# EAGLE board Qwiic_High_Performance_Magnetometer_X01-Panel (EAGLE 9.6.2), part 1 of 4
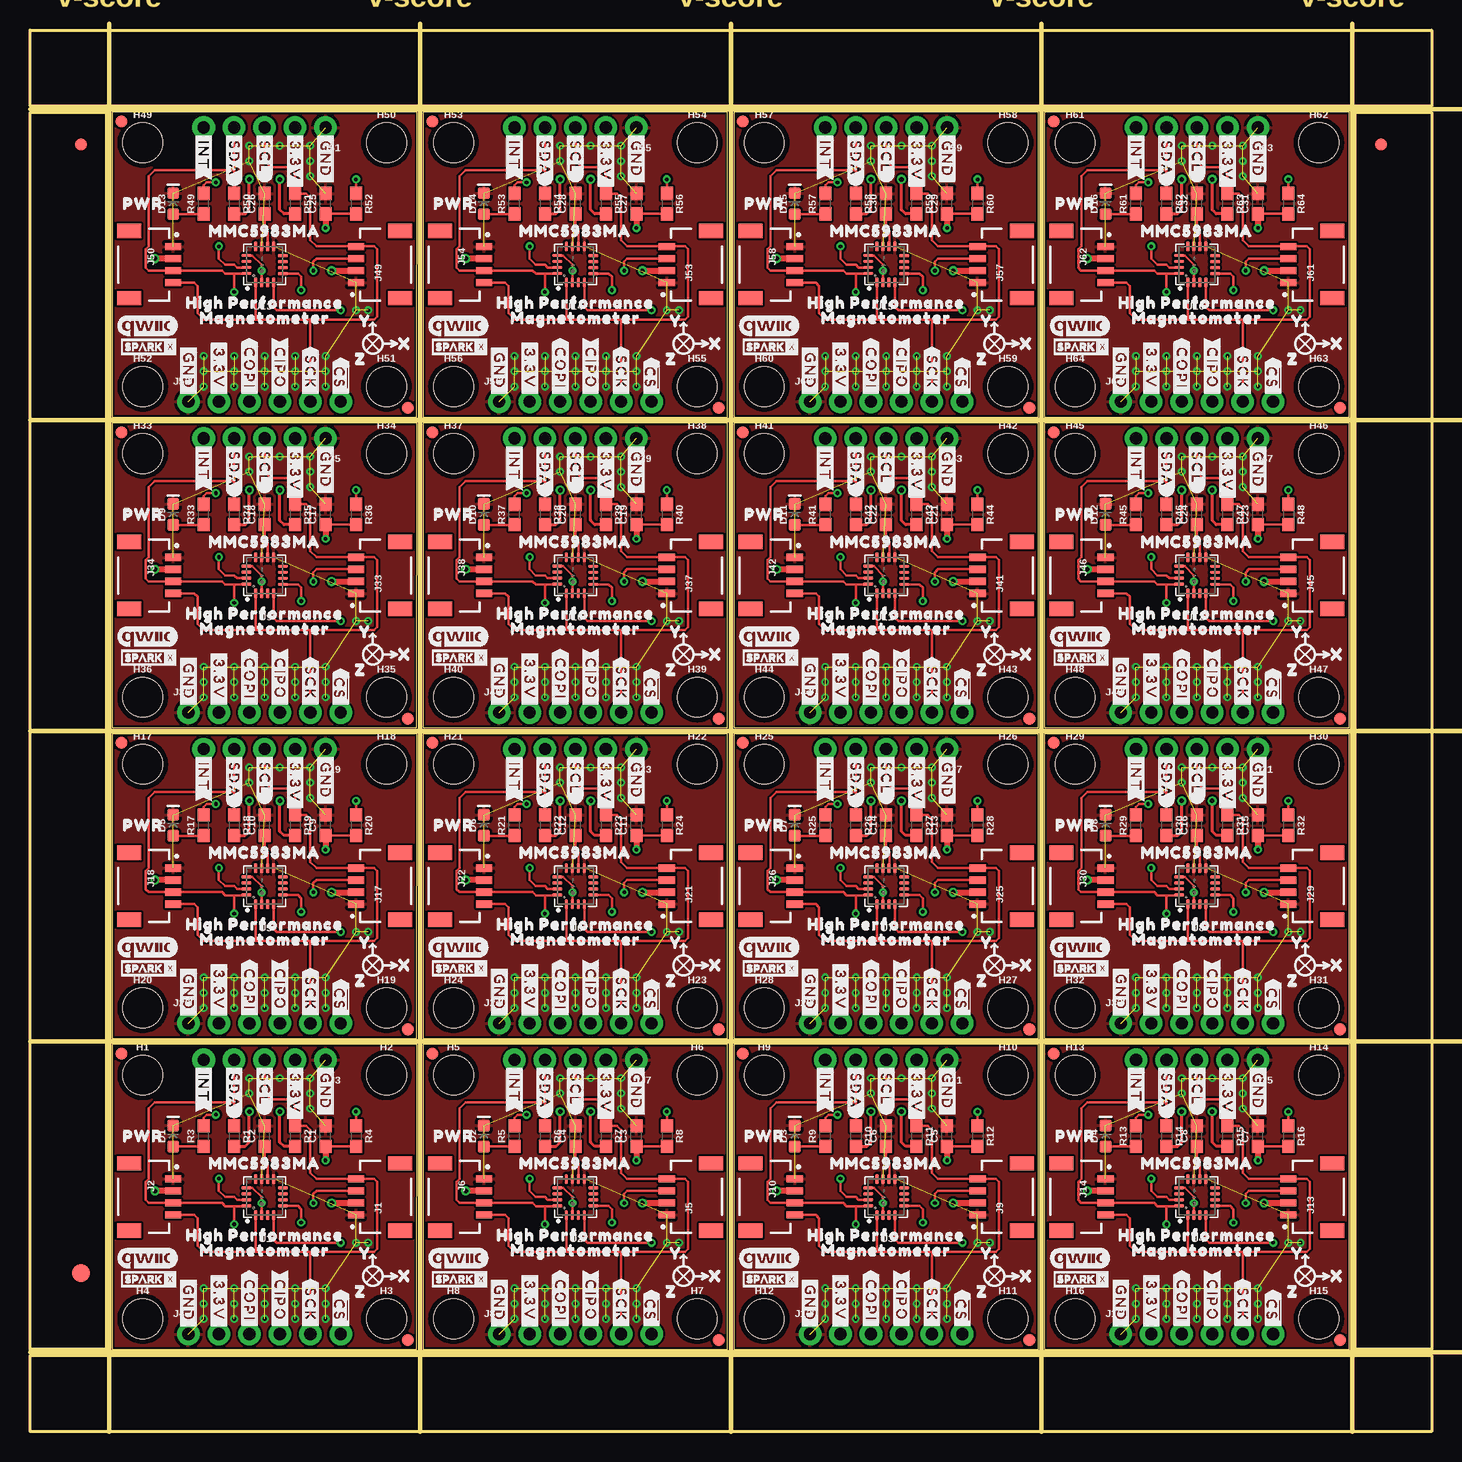
[diagram p0: board, top side]
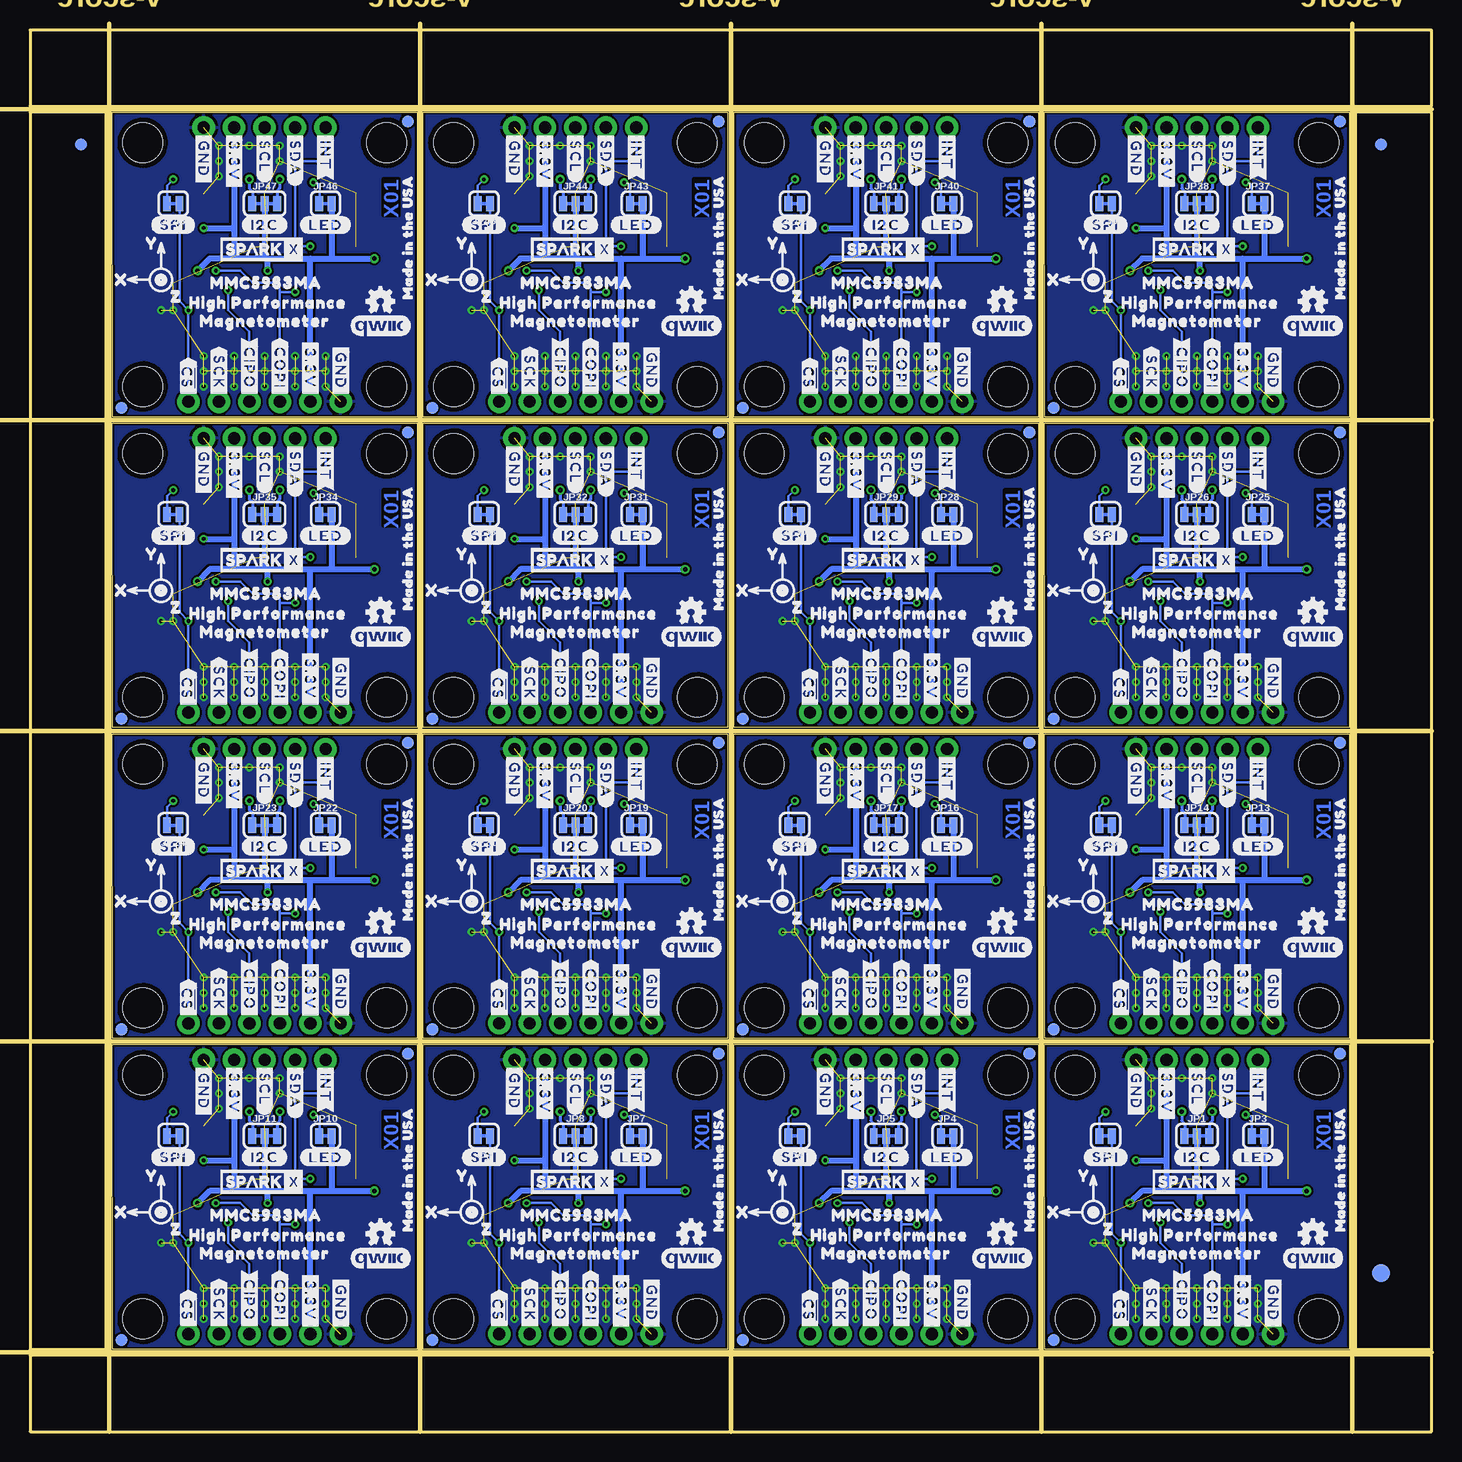
[diagram p1: board, bottom side, seen from below]

Size 116.84 x 116.84 mm. Coordinates in mm from the lower left corner, seen from the top.
Outline: 6.86,6.86 32.24,6.86 32.26,32.26 6.86,32.26 6.86,6.86
Outline: 32.77,6.86 58.15,6.86 58.17,32.26 32.77,32.26 32.77,6.86
Outline: 58.67,6.86 84.05,6.86 84.07,32.26 58.67,32.26 58.67,6.86
Outline: 84.58,6.86 109.96,6.86 109.98,32.26 84.58,32.26 84.58,6.86
Outline: 6.86,32.77 32.24,32.77 32.26,58.17 6.86,58.17 6.86,32.77
Outline: 32.77,32.77 58.15,32.77 58.17,58.17 32.77,58.17 32.77,32.77
Outline: 58.67,32.77 84.05,32.77 84.07,58.17 58.67,58.17 58.67,32.77
Outline: 84.58,32.77 109.96,32.77 109.98,58.17 84.58,58.17 84.58,32.77
Outline: 6.86,58.67 32.24,58.67 32.26,84.07 6.86,84.07 6.86,58.67
Outline: 32.77,58.67 58.15,58.67 58.17,84.07 32.77,84.07 32.77,58.67
Outline: 58.67,58.67 84.05,58.67 84.07,84.07 58.67,84.07 58.67,58.67
Outline: 84.58,58.67 109.96,58.67 109.98,84.07 84.58,84.07 84.58,58.67
Outline: 6.86,84.58 32.24,84.58 32.26,109.98 6.86,109.98 6.86,84.58
Outline: 32.77,84.58 58.15,84.58 58.17,109.98 32.77,109.98 32.77,84.58
Outline: 58.67,84.58 84.05,84.58 84.07,109.98 58.67,109.98 58.67,84.58
Outline: 84.58,84.58 109.96,84.58 109.98,109.98 84.58,109.98 84.58,84.58
Outline: 0,6.35 116.84,6.35 116.84,0 0,0 0,6.35
Outline: 110.49,109.98 116.84,109.98 116.84,6.86 110.49,6.86 110.49,109.98
Outline: 0,116.84 116.84,116.84 116.84,110.49 0,110.49 0,116.84
Outline: 0,109.98 6.35,109.98 6.35,6.86 0,6.86 0,109.98
Copper layers (1*16): Top 0.035mm / dielectric 1.5mm / Bottom 0.035mm
Design rules "Qwiic_High_Performance_Magnetometer_X01": minimum track width 7mil, minimum drill 0.3mm, track to track 7mil, track to pad 7mil, pad to pad 7mil, via to via 7mil, smd to smd 7mil, copper to edge 7mil, drill to drill 7mil, minimum pad ring 7mil, minimum via ring 7mil, stop-mask expansion 4mil, vias tented up to drill 25mil, thermal gap 10mil
Milling: 10 lines

## Footprints (pad centres in the part's own frame; a part is rotated, then mirrored left to right if it is on the bottom)
0603 = smd 1.1 x 1: 1 -0.85,0; 2 0.85,0
LED-0603 = smd 1 x 1: A -0.877,0; C 0.877,0
FIDUCIAL-1X2 = smd 1 x 1: 1 0,0
FIDUCIAL-1.5X3 = smd 1.5 x 1.5: 1 0,0
STAND-OFF = hole 3.302: 0,0
JST04_1MM_RA = smd 0.6 x 1.35: 1 -1.5,0; 2 -0.5,0; 3 0.5,0; 4 1.5,0 | smd 1.2 x 2: NC1 2.8,-3.675; NC2 -2.8,-3.675
1X05_NO_SILK = drill 1.016 pad 1.88: 1 0,0; 2 2.54,0; 3 5.08,0; 4 7.62,0; 5 10.16,0
1X06_NO_SILK = drill 1.016 pad 1.88: 1 0,0; 2 2.54,0; 3 5.08,0; 4 7.62,0; 5 10.16,0; 6 12.7,0
SMT-JUMPER_3_2-NC_TRACE_SILK = smd 0.66 x 1.27: 1 -1.041,0; 2 0,0; 3 1.041,0
SMT-JUMPER_2_NC_TRACE_SILK = smd 0.66 x 1.27: 1 -0.521,0; 2 0.521,0
LGA-16-3X3MM-4X4PINS = smd 0.3 x 0.85: 1 0.754,1.498; 2 0.254,1.498; 3 -0.246,1.498; 4 -0.746,1.498; 9 -0.746,-1.506; 10 -0.246,-1.506; 11 0.254,-1.506; 12 0.754,-1.506 | smd 0.85 x 0.3: 5 -1.508,0.746; 6 -1.508,0.246; 7 -1.508,-0.254; 8 -1.508,-0.754; 13 1.496,-0.764; 14 1.496,-0.264; 15 1.496,0.236; 16 1.496,0.736